# Altium PCB LampOne.PcbDoc
Units mm, origin at the board's own origin, x right, y up, seen from the top; angles counter-clockwise.
Board outline 63 x 19 mm, 2 copper layers (Top Layer, Bottom Layer), stack 1.571 mm thick; 38 components, 25 nets, 132 pads, 82 vias.
Unrouted connection lines stored in the file: 12.
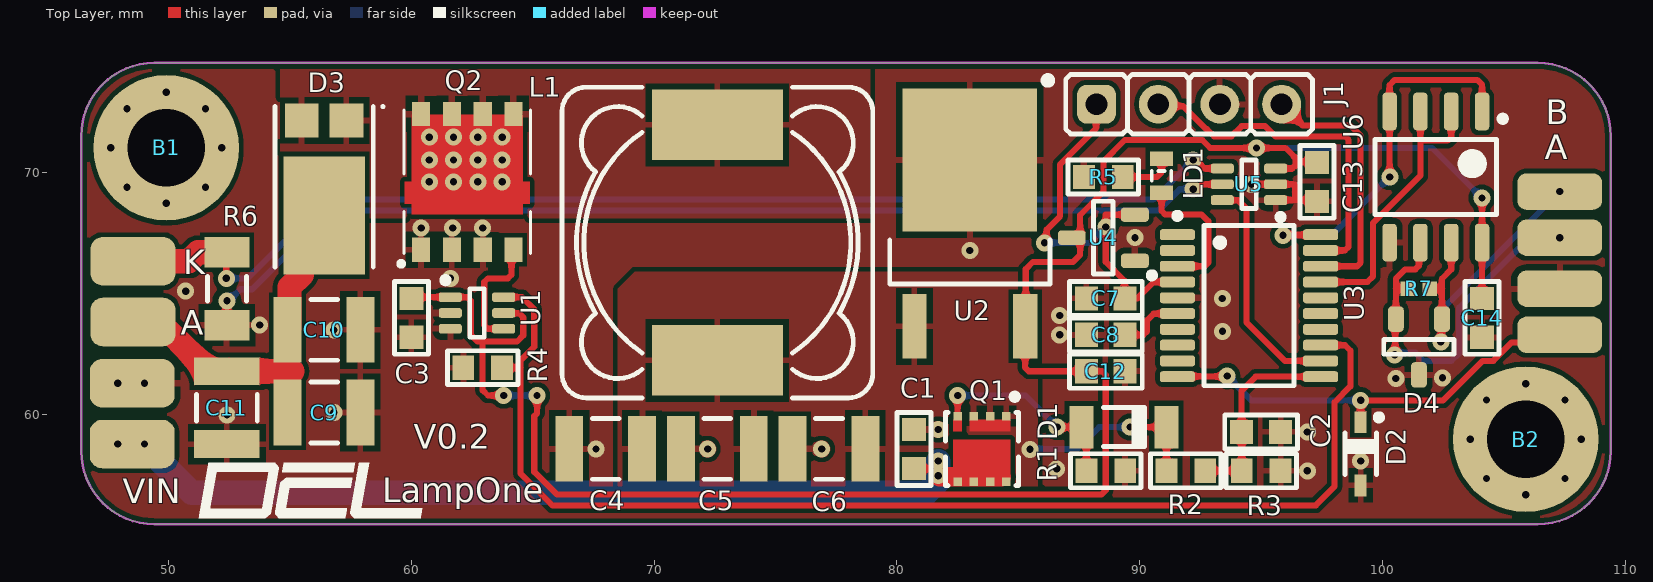
[diagram p0: Top Layer view]
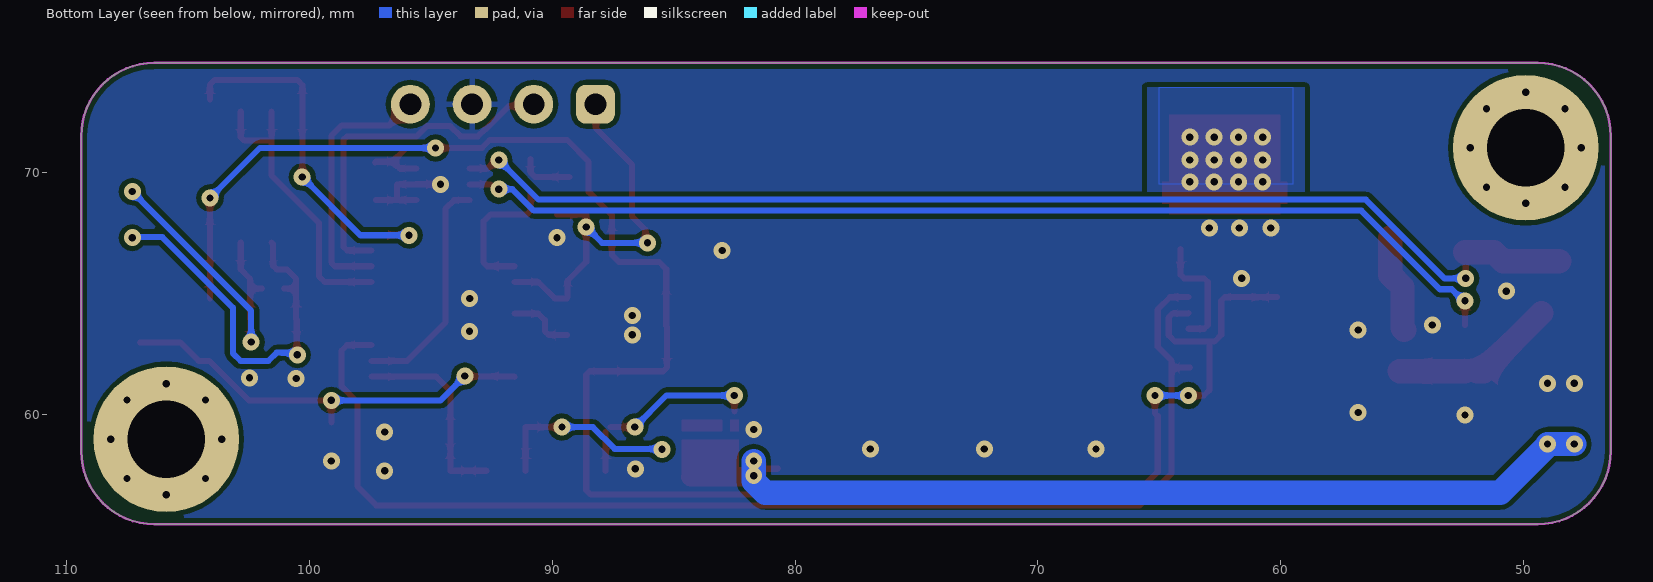
[diagram p1: Bottom Layer view, seen from below]
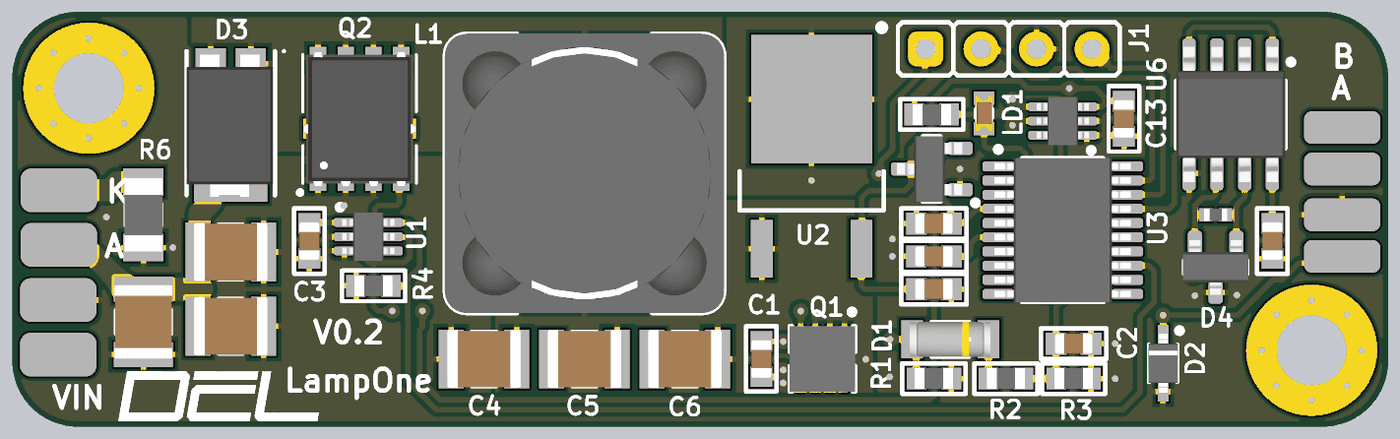
[diagram p2: 3D render of the assembled board from above, using the file's embedded part models]

## Layer stack, top to bottom
Top Solder: solder mask 0.0102, Solder Resist, Dk 3.5
Top Layer: signal copper 0.0356
Dielectric 1: dielectric 1.5, FR-4, Dk 4.8
Bottom Layer: signal copper 0.0356
Bottom Solder: solder mask 0.0102, Solder Resist, Dk 3.5

## Board outline
49.4,55.5 cw(c49.4,58.5) 46.4,58.5 46.4,71.5 cw(c49.4,71.5) 49.4,74.5 106.4,74.5 cw(c106.4,71.5) 109.4,71.5 109.4,58.5 cw(c106.4,58.5) 106.4,55.5

## Design rules (kind name [scope] priority, off if disabled: settings)
Clearance [All] p1: gap=0.2 ignorepadtopadclearanceinfootprint=FALSE
HoleSize [All] p1: absolutevalues=TRUE maxlimit=5 minlimit=0.2 maxpercent=80.000 minpercent=20.000
MinimumSolderMaskSliver [All] p1: minsoldermaskwidth=0
PolygonConnect [All] p1: thpad.connectstyle=Relief thpad.reliefconductorwidth=0.25 thpad.reliefentries=4 thpad.polygonreliefangle="90 Angle" thpad.airgapwidth=0.25 smdpad.connectstyle=Relief smdpad.reliefconductorwidth=0.25 smdpad.reliefentries=4 smdpad.polygonreliefangle="90 Angle" smdpad.airgapwidth=0.25 via.connectstyle=Direct via.reliefconductorwidth=0.254 via.reliefentries=4 via.polygonreliefangle="90 Angle" via.airgapwidth=0.254
RoutingVias [All] p1: holewidth=0.3 width=0.7 viastyle="Through Hole" minholewidth=0.3 minwidth=0.7 maxholewidth=1 maxwidth=1
SilkToSilkClearance [All] p1: silktosilkclearance=0.1
SilkToSolderMaskClearance [IsPad] p1: minsilkscreentomaskgap=0.1 clearancetoexposedcopper=TRUE
SolderMaskExpansion [All] p1: expansion=0.102 istentingtop=FALSE
Width [All] p1: maxlimit=2 minlimit=0.2 preferedwidth=0.25
26 further rules are at their usual default settings.

## Components (designator, comment, footprint, x,y, rotation, side; value= is the part's Value field where it differs from the comment)
B1 "Non Plated Hole" MTG600H320V8P#1 49.9,71 r0 top
B2 "Non Plated Hole" MTG600H320V8P#2 105.9,59 r0 top
C1 "100n" CAPC1608X87N 80.7,58.6 r270 top
C2 "100n" CAPC1608X87N 95,59.3 r180 top
C3 "100n" CAPC1608X87N 60,64 r270 top
C4 "10u" CAPC3225X270N 68,58.6 r0 top
C5 "10u" CAPC3225X270N 72.6,58.6 r0 top
C6 "10u" CAPC3225X270N 77.2,58.6 r0 top
C7 "4.7u" CAPC1608X87N 88.6,64.8 r0 top
C8 "100n" CAPC1608X87N 88.6,63.3 r0 top
C9 "10u" CAPC3225X270N 56.4,60.1 r180 top
C10 "10u" CAPC3225X270N 56.4,63.5 r180 top
C11 "10u" CAPC3225X270N 52.4,60.3 r90 top
C12 "4.7u" CAPC1608X87N 88.6,61.8 r180 top
C13 "100n" CAPC1608X87N 97.3,69.6 r270 top
C14 "100n" CAPC1608X87N 104.1,64 r270 top
D1 "BZV55-B10" DIOMELF3515N 89.35,59.5 r180 top
D2 "CDSOD323-T03C" SOD2512X110N 99.1,58.4 r270 top
D3 "SBRT15U100SP5" SBRT15U100SP5 56.4,69.4 r270 top
D4 "CDSOT23-SM712" SOT95P240X130-3N 101.5,62.8 r270 top
J1 "Header 4" 3M_2304-6111-TG 88.22,72.8 r0 top
L1 "10uH" IND_BOURNS_PM127SH 72.6,67.1 r90 top
LD1 "Red" LEDC1608X80N_RED 90.9,69.847 r270 top
Q1 "IRFHM9331" PQFN50P300X300X100_HS-9N 83.5,58.6 r270 top
Q2 "AON6294" DFN-5X6-8L 62.3,69.6 r90 top
R1 "5k1" RESC1608X55N 88.6,57.7 r180 top
R2 "100k" RESC1608X55N 91.9,57.7 r180 top
R3 "2k" RESC1608X55N 95,57.7 r180 top
R4 "100k" RESC1608X55N 62.935,61.946 r0 top
R5 "2k" RESC1608X55N 88.5,69.8 r0 top
R6 "0R033" RESC3216X80N 52.4,65.2 r90 top
R7 "120" RESC1005X40N 101.5,65.2 r180 top
U1 "TS5A3159" SOT65P210X110-6N 62.7,64.2 r0 top
U2 "L78M05CDT" TO228P1010X239-3N-R521X544 83,67.9 r90 top
U3 "STM32G030F6P6" SOP65P640X110-20N 94.5,64.5 r0 top
U4 "XC6206P332MR" SOT95P280X115-3N 88.5,67.3 r180 top
U5 "INA213" SOT65P210X110-6N 94.5,69.5 r180 top
U6 "MAX485ESA" SOIC127P600X175-8N 102.195,69.8 r270 top

## Footprints (in the part's own frame and the unit in brackets; to place one, negate y for a bottom-side part, rotate by r counter-clockwise, add the part's x,y. Pads: shape width x height; smd on the part's side, far side on the other; paste and mask are expansions set on the pad)
3M_2304-6111-TG [mm] "4 Contacts Straight Strip Header Pitch 2.54mm L=5.8mm ''Mini-Wire-Wrap''"
  rrect50% 1.6x1.6 hole 0.9: 1(0,0)
  round 1.6 hole 0.9: 2(2.54,0) 3(5.08,0) 4(7.62,0)
  silkscreen extent -2.16,-1.23 8.89,1.23
CAPC1608X87N [mm] "Chip Capacitor, Body 1.6x0.8mm IPC Medium Density"
  rect 0.95x1 smd: 1(-0.8,0) 2(0.8,0)
  silkscreen extent -1.5,-0.7 1.5,0.7, body extent -0.87,-0.47 0.88,0.48, height 0.87
CAPC3225X270N [mm] "Chip Capacitor, Body 3.2x2.5mm, IPC Medium Density"
  rect 1.15x2.7 smd: 1(-1.5,0) 2(1.5,0)
  silkscreen extent -0.55,-1.25 0.55,1.25, body extent -1.7,-1.35 1.7,1.35, height 2.7
DFN-5X6-8L [mm] "DFN 5x6"
  rect 1x0.75 smd: 1(-2.795,1.905) 2(-2.795,0.635) 3(-2.795,-0.635) 4(-2.795,-1.905) 5(2.795,-1.905) 6(2.795,-0.635) 7(2.795,0.635) 8(2.795,1.905)
  Top Layer region: 0,2.28 2.775,2.28 2.775,-2.28 0,-2.28 0,-2.575 -0.905,-2.575 -0.905,-2.28 -1.33,-2.28 -1.33,2.28 -0.905,2.28 -0.905,2.575 0,2.575
  silkscreen extent -3.47,-2.6 2.95,2.82, body extent -3.09,-2.58 3.06,2.57, height 1.1
DIOMELF3515N [mm] "SOD80C, MELF Diode, 2-Leads, Body 3.5x1.5mm, IPC Medium Density"
  rect 1x1.75 smd: 1(-1.75,0) 2(1.75,0)
  silkscreen extent -0.85,-0.8 0.85,0.8, body extent -1.85,-0.8 1.85,0.8, height 1.6
IND_BOURNS_PM127SH [mm] "SMD Inductor  Body Width 12.5mm Body Lenght 12.5mm Height 8mm"
  rect 2.9x5.4 smd: 1(-4.85,0) 2(4.85,0)
  silkscreen extent -6.4,-6.4 6.4,6.4, body extent -6.4,-6.4 6.4,6.4, height 8
LEDC1608X80N_RED [mm] "Chip RED LED, 2-Leads, Body 1.6x0.8mm, IPC Medium Density"
  rect 0.6x0.95 smd: 1(-0.7,0) 2(0.7,0)
  silkscreen extent -0.2,-0.4 0.2,0.4, body extent -0.8,-0.4 0.8,0.4, height 0.6
MTG600H320V8P#1 [mm] "Through Hole: Hole Dia.=3.2mm Pad Dia.=6mm + 8 Via Dia.=0.3mm"
  round 6 hole 3.2 unplated: MH1(0,0)
MTG600H320V8P#2 [mm] "Through Hole: Hole Dia.=3.2mm Pad Dia.=6mm + 8 Via Dia.=0.3mm"
  round 6 hole 3.2 unplated: MH2(0,0)
PQFN50P300X300X100_HS-9N [mm] "PQFN, 8-Leads, Body 3,00x3,00mm, Pitch 0,50mm, Thermal Pad 4,00x2,20mm, IPC Medium Density"
  rect 0.35x0.35 smd: 1(-1.35,0.998) 2(-1.35,0.332) 3(-1.35,-0.334) 4(-1.35,-1) 5(1.35,-1) 6(1.35,-0.334) 7(1.35,0.332) 8(1.35,0.998)
  Top Layer region: -0.375,1.173 1.2,1.173 1.2,-1.175 -0.375,-1.175
  Top Layer region: -1.2,1.173 -0.725,1.173 -0.725,-0.509 -1.2,-0.509
  Top Layer region: -1.2,-0.825 -0.725,-0.825 -0.725,-1.175 -1.2,-1.175
  silkscreen extent -2.27,-1.5 1.5,1.5, body extent -1.51,-1.5 1.52,1.5, height 1
RESC1005X40N [mm] "Chip Resistor, EIA 0402, Metric 1005, Body 1.0x0.5mm, IPC Medium Density"
  rect 0.6x0.6 smd: 1(-0.45,0) 2(0.45,0)
  body extent -0.52,-0.27 0.53,0.28, height 0.4
RESC1608X55N [mm] "Chip Resistor, EIA 0603, Metric 1608, Body 1.6x0.8mm, IPC Medium Density"
  rect 0.9x1 smd: 1(-0.8,0) 2(0.8,0)
  silkscreen extent -1.45,-0.7 1.45,0.7, body extent -0.87,-0.47 0.88,0.48, height 0.55
RESC3216X80N [mm] "Chip Resistor, EIA 1206, Metric 3216, Body 3.2x1.6mm, IPC Medium Density"
  rect 1.25x1.85 smd: 1(-1.5,0) 2(1.5,0)
  silkscreen extent -0.5,-0.8 0.5,0.8, body extent -1.67,-0.87 1.68,0.88, height 0.8
SBRT15U100SP5 [mm] "DFN, 3-Leads, Body 4.05x6.6mm"
  rect 1.4x1.39 smd: 1(-2.727,0.92) 2(-2.727,-0.92)
  rect 4.86x3.36 smd: 3(1.177,0)
  silkscreen extent -3.35,-2.02 3.3,2.48, body extent -3.14,-2.03 3.37,1.94, height 1.15
SOD2512X110N [mm] "Small Outline Diode Flat Lead (SOD-323), 1.70mm W X 1.25mm L X 1.10mm H body,  IPC Medium Density"
  rect 0.9x0.5 smd: 1(-1.3,0) 2(1.3,0)
  silkscreen extent -1.62,-0.65 0.85,0.88, body extent -1.35,-0.67 1.35,0.68, height 1.1
SOIC127P600X175-8N [mm] "SOIC 8, Pitch 1.27mm - Body 4x5mm, IPC Medium Density"
  rrect50% 1.55x0.6 smd: 1(-2.7,1.905) 2(-2.7,0.635) 3(-2.7,-0.635) 4(-2.7,-1.905) 5(2.7,-1.905) 6(2.7,-0.635) 7(2.7,0.635) 8(2.7,1.905)
  silkscreen extent -2.52,-2.5 1.55,2.88, body extent -3.1,-2.5 3.1,2.5, height 1.75
SOP65P640X110-20N [mm] "SOP, 20-Leads, Body 6.6x4.5mm (max), Pitch 0.65mm, IPC Medium Density"
  rrect50% 1.45x0.45 smd: 1(-2.95,2.925) 2(-2.95,2.275) 3(-2.95,1.625) 4(-2.95,0.975) 5(-2.95,0.325) 6(-2.95,-0.325) 7(-2.95,-0.975) 8(-2.95,-1.625) 9(-2.95,-2.275) 10(-2.95,-2.925) 11(2.95,-2.925) 12(2.95,-2.275) 13(2.95,-1.625) 14(2.95,-0.975) 15(2.95,-0.325) 16(2.95,0.325) 17(2.95,0.975) 18(2.95,1.625) 19(2.95,2.275) 20(2.95,2.925)
  silkscreen extent -3.07,-3.3 1.85,3.82, body extent -3.12,-3.3 3.12,3.3, height 1.19
SOT65P210X110-6N [mm] "SOT363, SC70-6, SOT, 0.65mm Pitch, 6 pin, 1.25mm W X 2.00mm L X 1.10mm H, IPC Medium Density"
  rrect50% 0.95x0.4 smd: 1(-1.1,0.65) 2(-1.1,0) 3(-1.1,-0.65) 4(1.1,-0.65) 5(1.1,0) 6(1.1,0.65)
  silkscreen extent -1.42,-1 0.3,1.47, body extent -1.2,-1.1 1.2,1.1, height 1.1
SOT95P240X130-3N [mm] "SOT23 3-Leads, Pitch 0.95mm - Body 1.3x2.9mm, IPC Medium Density"
  rrect50% 1.05x0.65 smd: 1(-1.15,0.95) 2(-1.15,-0.95) 3(1.15,0)
  silkscreen extent -0.3,-1.45 0.3,1.45, body extent -1.25,-1.5 1.25,1.5, height 1.3
SOT95P280X115-3N [mm] "SOT23SOT, 0.95mm, pitch;3 pin,1.55mm W X 2.95mm L X 1.15mm H body, IPC Medium Density"
  rrect50% 1.15x0.6 smd: 1(-1.3,0.95) 2(-1.3,-0.95) 3(1.3,0)
  silkscreen extent -2.12,-1.5 0.4,1.67, body extent -1.4,-1.5 1.6,1.5, height 1.15
TO228P1010X239-3N-R521X544 [mm] "TO-252AA DPAK TO, 2.28mm pitch; 2 pin, 10.105mm L X 6.095mm W X 2.39mm H body, IPC Medium Density"
  rect 2.65x1 smd: 1(-4.25,2.28) 2(-4.25,-2.28)
  rect 5.9x5.55 smd: 3(2.6,0)
  silkscreen extent -2.5,-3.3 -0.7,3.3, body extent -5,-3.38 5.27,3.37, height 2.38

## Part data
B1 B2: library part NON-PLATED_HOLE3.2_PAD6.0_8p, "Single Terminal Socket", Author=DEL, Component Type="Standard (No BOM)", ComponentHeight=0mm, CreateDate=11/21/2022, Family="Non Plated Hole", LatestRevisionDate=11/21/2022, Mounted=No, PackageDescription="Non Plated Through Hole: Hole Dia.=3.2mm", Part Description="Through Hole: Hole Dia.=3.2mm Pad Dia.=6mm + 6 Via Dia.=0.3mm", Part Number=NON-PLATED_HOLE3.2_PAD6.0_8p, Pin Count=1, SMD=No, Socket=No, Status=None
C1 C2 C3 C8 C13 C14: library part CC0603_100NF_50V_10%_X7R, "Non-polarised capacitor", Case=0603, Manufacturer=GENERIC, Manufacturer1 ComponentHeight=0.87mm, Tolerance=±10%, Voltage=50V, Author=Elman, Component Type=Standard, CreateDate=7/14/2014, LatestRevisionDate=7/14/2014, Manufacturer Part Number=CC0603_100NF_50V_10%_X7R, Mounted=Yes, Part Description="SMD Multilayer Chip Ceramic Capacitor", Part Number=CC0603_100NF_50V_10%_X7R, Pin Count=2, SMD=Yes, Socket=No, Status=Preferred, TC=X7R
C4 C5 C6 C9 C10 C11: library part CC1210_10UF_25V_10%_X7R, "Non-polarised capacitor", Case=1210, Manufacturer=GENERIC, Manufacturer1 ComponentHeight=2.7mm, Manufacturer1 Example=KEMET, Manufacturer1 Part Number=C1210C106K3RAC, Manufacturer Part Number=CC1210_10UF_50V_10%_X7R, Tolerance=±10%, Voltage=50V, Author="CERN DEM JLC", Component Type=Standard, CreateDate=5/5/2009, HelpURL=\\cern.ch\dfs\Applications\Altium\Datasheets\CC1210_X7R_KEMET.pdf, LatestRevisionDate=4/1/2010, Mounted=Yes, Part Description="SMD Multilayer Chip Ceramic Capacitor", Part Number=CC1210_10UF_50V_10%_X7R, Pin Count=2, SMD=Yes, Socket=No, Status=None, TC=X7R
C7 C12: library part CC0603_4.7UF_10V_10%_X5R, "Non-polarised capacitor", Case=0603, Manufacturer=GENERIC, Manufacturer1 ComponentHeight=0.95mm, Manufacturer1 Example=TDK, Manufacturer1 Part Number=C1608X5R1A475K080AC, Manufacturer Part Number=CC0603_4.7uF_10V_10%_X5R, Tolerance=±10%, Voltage=10V, Author=ELMAN, Component Type=Standard, CreateDate=11/13/2016, LatestRevisionDate=11/13/2016, Mounted=Yes, Part Description="SMD Multilayer Chip Ceramic Capacitor", Part Number=CC0603_4.7UF_10V_10%_X5R, Pin Count=2, SMD=Yes, Socket=No, Status=Preferred, TC=X5R
D1: "Zener Diode", Case=SOD-80C, Manufacturer="PHILIPS NXP", Power=500mW, Voltage=10V, Author="CERN DEM JLC", Component Type=Standard, ComponentHeight=1.6mm, CreateDate=5/6/2008, Device=BZV55-B10, HelpURL=\\cern.ch\dfs\Applications\Altium\Datasheets\BZV55.pdf, LatestRevisionDate=5/6/2008, Manufacturer Part Number=BZV55-B10, Mounted=Yes, PackageDescription="SOD80C, MELF Diode, 2-Leads, Body 3.5x1.5mm, IPC Medium Density", Part Description="Voltage Regulator Diode", Part Number=BZV55-B10, Pin Count=2, SMD=Yes, Socket=No
D2: "Transient Voltage Suppressor Diode (Bi-Directional)", Case=SOD323, Manufacturer=BOURNS, Power=20A, Voltage=4V, Author=DEL, Component Type=Standard, ComponentHeight=1.1mm, CreateDate=11/21/2022, Device=CDSOD323-T03C, LatestRevisionDate=11/21/2022, Manufacturer Part Number=CDSOD323-T03C, Mounted=Yes, PackageDescription="SOD-323, 1.70mm W X 1.25mm L X 1.10mm H", Part Description="TVS Diode", Part Number=CDSOD323-T03C, Pin Count=3, SMD=Yes, Socket=No
D3: "Diode  Schottky Anode pin 1 and 2 cathode pin 3", Case=DFN, Manufacturer=DIODES, Power=15A, Voltage=100V, Author=DEL, Component Type=Standard, ComponentHeight=1.15mm, CreateDate=6/24/2022, Device=SBRT15U100SP5, LatestRevisionDate=6/24/2022, Manufacturer Part Number=SBRT15U100SP5, Mounted=Yes, PackageDescription="DFN, 3-Leads, Body 4.05x6.6mm", Part Description="Schottky Rectifier", Part Number=SBRT15U100SP5, Pin Count=3, SMD=Yes, Socket=No
D4: "Transient Voltage Suppressor Diode (Bi-Directional)", Case=SOT23-3, Manufacturer=BOURNS, Power=17A, Voltage=7.5V, Author=DEL, Component Type=Standard, ComponentHeight=1.3mm, CreateDate=1/27/2022, Device=CDSOT23-SM712, LatestRevisionDate=1/27/2022, Manufacturer Part Number=CDSOT23-SM712, Mounted=Yes, PackageDescription="SOT23 3-Leads, Pitch 0.95mm - Body 1.3x2.9mm, IPC Medium Density", Part Description="TVS Diode", Part Number=CDSOT23-SM712, Pin Count=3, SMD=Yes, Socket=No
J1: library part 3M_2304-6111-TG, "Connector 4 Male", Manufacturer=3M, Author=DEL, Component Type=Standard, ComponentHeight=8.4mm, CreateDate=2018-09-13, Family="Header 4", LatestRevisionDate=2018-09-13, Manufacturer Part Number=3M_2304-6111-TG, Mounted=Yes, Part Description="4 Contacts - Vertival Contacts Straight Strip Header Pitch 2.54", Part Number=3M_2304-6111-TG, Pin Count=4, SMD=No, Socket=No, Status=None
L1: library part IND_4.7UH_20%_SUMIDA_CDRH124, "Inductor", Manufacturer=SUMIDA, Manufacturer Part Number=CDRH125NP-10R, Part Number=IND_10UH_20%_SUMIDA_CDRH125, Power=4A, Resistance=0.018R, Tolerance=±20%, Author="CERN DEM JLC", Component Type=Standard, ComponentHeight=4.5mm, CreateDate=11/18/2009, HelpURL=\\cern.ch\dfs\Applications\Altium\Datasheets\IND_BOURNS_PM127SH.pdf, LatestRevisionDate=11/18/2009, Mounted=Yes, Part Description="Shielded SMD Power Inductors CDRH125 Series", Pin Count=2, SMD=Yes, Socket=No, Status=None
LD1: library part LED_ROHM_SML-311UTT86K, "LED 1C 2A", Manufacturer=ROHM, Manufacturer Part Number=SML-311UTT86K, Author="CERN DEM JLC", Color=Red, Component Type=Standard, ComponentHeight=0.8mm, CreateDate=3/16/2010, HelpURL=\\cern.ch\dfs\Applications\Altium\Datasheets\LED_ROHM_SML-311UTT86K.pdf, LatestRevisionDate=3/17/2010, Mounted=Yes, PackageDescription="Chip Red LED, 2-Leads, Body 1.6x0.8mm, IPC Medium Density", Part Description="Low current chip LED SML-311 Serie", Part Number=LED_ROHM_SML-311UTT86K, Pin Count=2, SMD=Yes, Socket=No
Q1: library part IRFHM9331TRPbF, "P-CHANNEL MOSFET WITH DIODE", Case=PQFN, Manufacturer=INFINEON, Author=DEL, Component Type=Standard, ComponentHeight=1mm, CreateDate=29.01.2018, Device=IRFHM9331, LatestRevisionDate=29.01.2018, Manufacturer Part Number=IRFHM9331TRPbF, Mounted=Yes, PackageDescription="PQFN, 8-Leads, Body 3,00x3,00mm, Pitch 0,50mm, Thermal Pad 4,00x2,20mm, IPC Medium Density", Part Description="-30V 11A 0.014 Ohm P-Channel  MOSFET", Part Number=IRFHM9331TRPbF, Pin Count=8, SMD=Yes, Socket=No
Q2: Case=DFN-5X6, Manufacturer="LPHA & OMEGA SEMICONDUCTOR", Author=DEL, Component Type=Standard, ComponentHeight=1mm, CreateDate=6/24/2022, Device=AON6294, LatestRevisionDate=6/24/2022, Manufacturer Part Number=AON6294, Mounted=Yes, PackageDescription="DFN 5x6", Part Description="100V N-Channel AlphaMOS", Part Number=AON6294, Pin Count=8, SMD=Yes, Socket=No
R1: library part R0603_5K1_1%_0.1W_100PPM, "Resistor - 1%", Case=0603, Manufacturer=GENERIC, Manufacturer1 ComponentHeight=0.55mm, Manufacturer1 Example="NIC COMPONENT", Manufacturer1 Part Number=NRC06F5101TRF, Power=0.1W, Tolerance=±1%, Author="CERN DEM JLC", Component Type=Standard, CreateDate=12/3/2007, HelpURL=\\cern.ch\dfs\Applications\Altium\Datasheets\R0603_NIC_NRC.pdf, LatestRevisionDate=3/13/2008, Manufacturer Part Number=R0603_5K1_1%_0.1W_100PPM, Mounted=Yes, Part Description="General Purpose Thick Film Chip Resistor", Part Number=R0603_5K1_1%_0.1W_100PPM, Pin Count=2, SMD=Yes, Socket=No, Status=Preferred, TC=±100ppm/°C
R2 R4: library part R0603_100K_1%_0.1W_100PPM, "Resistor - 1%", Case=0603, Manufacturer=GENERIC, Manufacturer1 ComponentHeight=0.55mm, Manufacturer1 Example="NIC COMPONENT", Manufacturer1 Part Number=NRC06F1003TRF, Power=0.1W, Tolerance=±1%, Author="CERN DEM JLC", Component Type=Standard, CreateDate=12/3/2007, HelpURL=\\cern.ch\dfs\Applications\Altium\Datasheets\R0603_NIC_NRC.pdf, LatestRevisionDate=3/13/2008, Manufacturer Part Number=R0603_100K_1%_0.1W_100PPM, Mounted=Yes, Part Description="General Purpose Thick Film Chip Resistor", Part Number=R0603_100K_1%_0.1W_100PPM, Pin Count=2, SMD=Yes, Socket=No, Status=Preferred, TC=±100ppm/°C
R3 R5: library part R0603_2K_1%_0.1W_100PPM, "Resistor - 1%", Case=0603, Manufacturer=GENERIC, Manufacturer1 ComponentHeight=0.55mm, Manufacturer1 Example="NIC COMPONENT", Manufacturer1 Part Number=NRC06F2001TRF, Power=0.1W, Tolerance=±1%, Author="CERN DEM JLC", Component Type=Standard, CreateDate=12/3/2007, HelpURL=\\cern.ch\dfs\Applications\Altium\Datasheets\R0603_NIC_NRC.pdf, LatestRevisionDate=3/13/2008, Manufacturer Part Number=R0603_2K_1%_0.1W_100PPM, Mounted=Yes, Part Description="General Purpose Thick Film Chip Resistor", Part Number=R0603_2K_1%_0.1W_100PPM, Pin Count=2, SMD=Yes, Socket=No, Status=Preferred, TC=±100ppm/°C
R6: library part R1206_0R033_1%_0.25W_100PPM, "Resistor - 1%", Case=1206, Manufacturer=YAGEO, Manufacturer Part Number=RC1206FR-0733RL, Power=0.25W, Tolerance=±1%, Author=DEL, Component Type=Standard, ComponentHeight=0.65mm, CreateDate=10/28/2023, LatestRevisionDate=10/28/2023, Mounted=Yes, Part Description="Low Value Flat Chip Resistor", Part Number=R1206_0R033_1%_0.25W_100PPM, Pin Count=2, SMD=Yes, Socket=No, TC=±100ppm/°C
R7: library part R0402_120R_1%_0.0625W_100PPM, "Resistor - 1%", Case=0402, Manufacturer=GENERIC, Manufacturer1 ComponentHeight=0.4mm, Manufacturer1 Example=PHYCOMP, Manufacturer1 Part Number=232270671201, Power=0.0625W, Tolerance=±1%, Author="CERN DEM JLC", Component Type=Standard, CreateDate=12/3/2007, HelpURL=\\cern.ch\dfs\Applications\Altium\Datasheets\R0402_Phycomp_RC0402.pdf, LatestRevisionDate=3/13/2008, Manufacturer Part Number=R0402_120R_1%_0.0625W_100PPM, Mounted=DNP, Part Description="General Purpose Thick Film Chip Resistor", Part Number=R0402_120R_1%_0.0625W_100PPM, Pin Count=2, SMD=Yes, Socket=No, Status="Not recommended", TC=±100ppm/°C
U1: library part TS5A3159DCKR, "1-Ω SPDT Analog Switch", Case=SC70-6, Manufacturer="TEXAS INSTRUMENTS", Manufacturer Part Number=ADS1271IBPW, Author=DEL, Component Type=Standard, ComponentHeight=1.1mm, CreateDate=6/20/2022, Device=TS5A3159, LatestRevisionDate=6/20/2022, Mounted=Yes, PackageDescription="SC70-6, SOT, 0.65mm Pitch, 6 pin", Part Description="1-Ω SPDT Analog Switch", Part Number=TS5A3159DCKR, Pin Count=6, SMD=Yes, Socket=No
U2: library part L78M05CDT-TR, "3-Terminal Regulator 1=IN 2=OUT 3=GND", Case=DPAK, Manufacturer="ST MICROELECTRONICS", Manufacturer Part Number=LM7805CT, Author=DEL, Component Type=Standard, ComponentHeight=2.39mm, CreateDate=12/13/2017, Device=L78M05CDT, LatestRevisionDate=12/13/2017, Mounted=Yes, PackageDescription="TO-252 DPAK TO, 2.28mm pitch; 2 pin, 10.105mm L X 6.095mm W X 2.39mm H body, IPC Medium Density", Part Description="3-Terminal 5V 0.5A Positive Voltage Regulator", Part Number=L78M05CDT-TR, Pin Count=3, SMD=No, Socket=No
U3: "Arm® Cortex®-M0+ 32-bit MCU", Case=TSSOP20, Manufacturer="ST Microelectronics", Manufacturer Part Number=STM32F030F4P6, Author=DEL, Component Type=Standard, ComponentHeight=1.2mm, CreateDate=1/26/2022, Device=STM32G030F6P6, LatestRevisionDate=7/21/2025, Mounted=Yes, PackageDescription="SOP, 20-Leads, Body 6.6x4.5mm (max), Pitch 0.65mm, IPC Medium Density", Part Description="Arm® Cortex®-M0+ 32-bit MCU", Part Number=STM32G030F6P6, Pin Count=20, SMD=Yes, Socket=No
U4: "3-Terminal Regulator 1=GND 2=OUT 3=IN", Case=SOT23, Manufacturer=TOREX, Manufacturer Part Number=SOT95P280X115-3N, Author=DEL, Component Type=Standard, ComponentHeight=1.1mm, CreateDate=1/27/2022, Device=XC6206P332MR, LatestRevisionDate=1/27/2022, Mounted=Yes, PackageDescription="SOT23 3-Leads, Pitch 0.95mm - Body 1.3x2.9mm, IPC Medium Density", Part Description="3-Terminal 3.3V 200mA Positive Voltage Regulator", Part Number=XC6206P332MR, Pin Count=3, SMD=Yes, Socket=No
U5: library part INA213xID, "INA21x Voltage Output, Low- or High-Side Measurement, Bidirectional, Zero-Drift Series, Current-Shunt Monitors. Wide Common-Mode Range: –0.3 V to 26 V.", Case=SC70-6, Manufacturer="TEXAS INSTRUMENTS", Manufacturer Part Number=INA213AIDCKT, Author=DEL, Component Type=Standard, ComponentHeight=1.1mm, CreateDate=10/9/2017, Device=INA213, LatestRevisionDate=10/9/2017, Mounted=Yes, PackageDescription="SOT363, SC70-6, SOT, 0.65mm Pitch, 6 pin, 1.25mm W X 2.00mm L X 1.10mm H, IPC Medium Density", Part Description="Current-Shunt Monitors,  –0.3 V to 26 V", Part Number=INA213xID, Pin Count=6, SMD=Yes, Socket=No
U6: "Low-Power, Slew-Rate-Limited / RS-485/RS-422 Transceivers", Case=SOIC8, Manufacturer=MAXIM, Author=DEL, Component Type=Standard, ComponentHeight=1.75mm, CreateDate=1/20/2020, Device=MAX485ESA, LatestRevisionDate=1/20/2020, Manufacturer Part Number=MAX485ESA, Mounted=Yes, PackageDescription="SOIC 8, Pitch 1.27mm - Body 4x5mm, IPC Medium Density", Part Description="Low-Power, Slew-Rate-Limited RS-485/RS-422 Transceivers", Part Number=MAX485ESA, Pin Count=8, SMD=Yes, Socket=No

## Free pads (board coordinates)
  rrect50% 3.5x2 smd: ""(48.5,58.8) ""(48.5,61.3) ""(48.526,63.827) ""(48.526,66.327)
  rrect50% 3.5x1.5 smd: ""(107.3,63.3) ""(107.3,65.2) ""(107.3,67.3) ""(107.3,69.2)

## Via types
v1: diameter 0.7, hole 0.3, Top Layer to Bottom Layer, tented both sides, 66 vias
v2: diameter 1, hole 0.3, Top Layer to Bottom Layer, 16 vias

## Nets (pads, with @x,y where several pads share a name; then routed paths per layer and width w, separated by ;. In a path a pad name is that pad's centre, name@x,y a point inside that pad or via, vN(x,y) a via of type N, cw(c..) or ccw(c..) an arc to the next point about the centre after c; other vN are vias at no path point)
0V: C1.1 C2.1 C3.2 C4.1 C5.1 C6.1 C7.1 C8.1 C9.1 C10.1 C11.1 C12.1 C13.2 C14.2 D2.2 D4.3 J1.3 pad.@48.5,61.3 pad.@107.3,65.2 Q2.1 Q2.2 Q2.3 R1.1 R3.1 R4.1 R5.1 R6.1 U1.2 U1.3 U2.3 U3.5 U4.1 U5.1 U5.2 U5.5 U6.5 | length 47.9
  Top Layer w0.25: R6.1 v1(52.4,64.7) ; v1@92.379,69.336 92.543,69.5 U5.5 ; U5.1 C13.2@97.25,68.85 ; U5.2 96.4,69.5 96.4,68.875
  Top Layer w0.254: v1(94.6,69.5) U5.2
  Bottom Layer w0.25: v1(52.4,64.7) 52.471,64.7 52.948,65.177 53.438,65.177 56.677,68.416 90.76,68.416 91.644,69.3 v1(92.2,69.3)
  other v1: 96.9,57.7 86.579,57.783 99.1,58.1 67.6,58.6 72.2,58.6 76.9,58.6 96.9,59.3 81.7,59.4 52.4,60 56.8,60.1 47.9,61.3 49,61.3 100.55,61.5 102.473,61.527 86.7,63.3 93.405,63.446 56.8,63.5 53.746,63.703 86.7,64.1 93.4,64.8 50.7,65.1 61.6,65.628 83,66.775 89.8,67.3 60.4,67.7 61.7,67.7 62.935,67.7
5V: C3.1 C12.2 C13.1 C14.1 U1.1 U1.5 U2.2 U4.3 U5.3 U6.8 | length 83.3
  Top Layer w0.25: C3.1@60.15,64.85 U1.1 62.297,64.85 62.444,64.704 62.444,63.3 62.719,63.025 64.351,63.025 64.605,63.279 64.605,64.017 64.44,64.182 63.818,64.182 U1.5 ; 62.935,62.96 62.935,61.018 63.153,60.8 v1(63.8,60.8) ; v1(65.175,60.8) 65.175,60.066 65.059,59.95 65.059,57.656 65.99,56.725 88.429,56.725 88.6,56.896 88.6,61.654 88.454,61.8 C12.2 85.426,61.8 85.28,61.946 U2.2 85.304,63.674 85.304,66.004 85.604,66.304 87.254,66.304 87.545,66.595 87.545,68.236 88.5,69.19 88.5,70.436 89.389,71.325 92.575,71.325 92.905,70.995 v1(94.805,70.995) 96.005,70.995 96.571,70.429 ; U5.3 96.293,70.15 96.571,70.429 ; C13.1 97.271,70.429 96.571,70.429 ; C14.1 U6.8 104.1,68.854 v1@104.246,69
  Bottom Layer w0.25: v1(63.8,60.8) v1(65.175,60.8) ; v1(94.805,70.995) 102.042,70.995 v1(104.098,68.938)
+3.3V: C7.2 J1.1 U3.4 U4.2 | length 16.8
  Top Layer w0.25: v1(86.078,67.091) 86.164,67.177 86.164,67.631 86.723,68.191 86.723,68.307 86.723,70.323 88.2,71.8 88.2,72.78 J1.1 ; C7.2 89.371,64.829 89.371,65.532 88.6,66.303 88.6,68.25 U4.2 ; C7.2@89.425,64.8 89.9,64.8 90.575,65.475 U3.4
  Bottom Layer w0.25: v1(86.078,67.091) 87.949,67.091 v1(88.6,67.741)
ADC_IN4: C2.2 R2.1 R3.2 U3.11 | length 8.3
  Top Layer w0.25: R2.1 R3.2 C2.2 94.2,61 94.775,61.575 U3.11
ADC_IN5: U3.12 U5.6 | length 9.5
  Top Layer w0.25: U5.6 93.405,68.845 94.042,68.845 94.4,68.487 94.4,63.8 95.975,62.225 U3.12
ADC_IN7: U3.14
BT1: D2.1 pad.@107.3,63.3 U3.10 | length 17.8
  Top Layer w0.25: D2.1 v1(99.1,60.6) 102.5,60.6 104.125,62.225 104.56,62.225 105.321,62.987 pad.@106.987,62.987
  Top Layer w0.254: U3.10 91.563,61.588 93.588,61.588 v1(93.6,61.6)
  Bottom Layer w0.25: v1(93.6,61.6) 94.6,60.6 v1(99.1,60.6)
DE: U3.17 U6.2 U6.3 | length 12.1
  Top Layer w0.25: U3.17 99.375,65.475 99.6,65.7 99.6,67.9 101.56,69.86 U6.3 ; 101.69,71.3 102.684,71.3 102.83,71.446 U6.2
LED+: C9.2 C10.2 C11.2 D3.3 pad.@48.526,63.827 | length 10.4
  Top Layer w1: pad.@49.25,64.2 51.55,61.9 51.55,61.875 51.625,61.8 C11.2@51.9,61.8 ; C11.2 55.1,61.8 ; C10.2 54.975,63.575 54.975,65.269 55.479,65.773 D3.3@55.479,67.302
LED-: pad.@48.526,66.327 R6.2 U5.4 | length 48.3
  Top Layer w0.25: v1(52.373,65.627) 52.373,66.673 R6.2 ; v1(92.2,70.5) 92.303,70.5 92.653,70.15 U5.4
  Top Layer w1: pad.@48.526,66.327 50.832,66.327 51.205,66.7 R6.2
  Bottom Layer w0.25: v1(52.373,65.627) 53.252,65.627 56.491,68.866 90.566,68.866 v1(92.2,70.5)
NetD1_2: D1.2 Q1.4 R1.2 | length 7.9
  Top Layer w0.25: 82.5,60.15 v1(82.5,60.8) ; v1(86.6,59.5) D1.2 ; R1.2 D1.2@87.8,59.3
  Bottom Layer w0.25: v1(82.5,60.8) 85.3,60.8 v1(86.6,59.5)
NetD3_1: D3.1 D3.2 L1.2 Q2.5 Q2.6 Q2.7 Q2.8
  other v1: 60.735,69.6 61.735,69.6 62.735,69.6 63.735,69.6 60.735,70.5 61.735,70.5 62.735,70.5 63.735,70.5 60.735,71.44 61.735,71.44 62.735,71.44 63.735,71.44
NetLD1_1: LD1.1 R5.2 | length 2.2
  Top Layer w0.254: R5.2 90.7,69.8 90.9,70 LD1.1
NetLD1_2: LD1.2 U3.3 | length 5.8
  Top Layer w0.25: LD1.2@90.9,69.1 90.9,68.4 91.05,68.25 92.55,68.25 92.825,67.975
  Top Layer w0.254: U3.3 92.676,66.125 92.825,66.274 92.825,67.975
NetQ2_4: Q2.4 U1.4 | length 4.9
  Top Layer w0.25: U1.4 63.153,63.55 63,63.703 63,65.475 63.153,65.628 63.974,65.628 64.121,65.774 Q2.4@64.121,66.83
NRST: C8.2 U3.6 | length 2.8
  Top Layer w0.25: C8.2 90.154,63.3 90.3,63.446 90.3,63.9 90.575,64.175 U3.6
RS485A: D4.2 pad.@107.3,67.3 R7.2 U6.6 | length 16
  Top Layer w0.25: v1(100.5,62.476) 100.525,62.501 100.525,63.925 D4.2 100.55,65.2 ; R7.2 100.55,65.2 ; U6.6 101.501,67.041 101.501,66.141 101.355,65.995 100.93,65.995 100.55,65.615 100.55,65.2
  Bottom Layer w0.25: v1(100.5,62.476) 100.586,62.562 101.142,62.562 101.143,62.564 101.35,62.564 101.689,62.225 102.841,62.225 103.153,62.537 103.153,64.416 106.062,67.325 107.275,67.325 v1(107.3,67.3)
RS485B: D4.1 pad.@107.3,69.2 R7.1 U6.7 | length 13
  Top Layer w0.25: R7.1 102.45,65.2 ; v1(102.4,63) 102.425,63.025 102.425,63.925 D4.1 102.45,65.2 ; U6.7 102.83,65.995 102.45,65.615 102.45,65.2
  Bottom Layer w0.25: v1(102.4,63) 102.4,64.3 v1(107.3,69.2)
SWCLK: J1.2 U3.19 | length 14.4
  Top Layer w0.25: J1.2 90.84,72.72 91.789,72.72 92.734,71.775 92.761,71.775 93.061,71.475 93.775,71.475 94.2,71.9 95.165,71.9 95.59,71.475 98.454,71.475 98.6,71.329 98.6,66.921 98.454,66.775 U3.19
SWDIO: J1.4 U3.18 | length 10.7
  Top Layer w0.25: J1.4 96.715,71.925 98.675,71.925 99.1,71.5 99.1,66.271 98.954,66.125 U3.18
TIM3_CH1: R4.2 U1.6 U3.13 | length 50.8
  Top Layer w0.25: R4.2 64.5,61.946 ; U1.6 64.555,64.85 65.059,64.346 65.059,62.809 64.5,62.25 64.5,61.946 ; U3.13 98.454,62.875 98.675,62.654 98.675,61.175 98.029,60.529 98.029,57.054 97.25,56.275 65.804,56.275 64.5,57.579 64.5,61.946
TIM3_CH3: U3.15
TXRX: U3.20 U6.1 U6.4 | length 15.3
  Top Layer w0.25: v1(95.9,67.4) 95.913,67.412 U3.20@97.437,67.412 ; U6.4 100.29,73.59 100.5,73.8 103.9,73.8 104.1,73.6 U6.1@104.1,73 ; U6.4@100.295,72.495 100.295,69.805 v1(100.3,69.8)
  Bottom Layer w0.25: v1(95.9,67.4) 97.9,67.4 v1(100.3,69.8)
VIN+: C1.2 pad.@48.5,58.8 Q1.5 Q1.6 Q1.7 Q1.8 | length 39.2
  Top Layer w0.25: C1.2 80.717,57.783 v1@81.7,57.783
  Top Layer w0.8: v1@81.75,57.45 82.5,57.45 84.3,57.45
  Bottom Layer w1: v1(47.9,58.8) v1(49,58.8) 49,58.746 50.946,56.8 81.231,56.8 81.7,57.269 v1(81.7,57.5) v1(81.7,58.1)
VP: C4.2 C5.2 C6.2 D1.1 L1.1 Q1.1 Q1.2 Q1.3 R2.2 U2.1 | length 7.8
  Top Layer w0.25: v1(89.6,59.5) D1.1 R2.2
  Bottom Layer w0.25: v1@85.479,58.6 87.431,58.6 88.331,59.5 v1(89.6,59.5)
  other v1: 85.479,58.583
pads on no net: B1.MH1 B2.MH2 U3.1 U3.2 U3.7 U3.8 U3.9 U3.16
copper on no net:
  other v2: 105.9,56.714 104.284,57.384 107.516,57.384 103.614,59 108.186,59 104.284,60.616 107.516,60.616 105.9,61.286 49.9,68.714 48.284,69.384 51.516,69.384 47.614,71 52.186,71 48.284,72.616 51.516,72.616 49.9,73.286

## Polygon pours and split planes (outlines as drawn)
0V on Top Layer "0V_L01_P016" (solid, pour order 16): 49.4,55.5 cw(c49.4,58.5) 46.4,58.5 46.4,71.5 cw(c49.4,71.5) 49.4,74.5 106.4,74.5 cw(c106.4,71.5) 109.4,71.5 109.4,58.5 cw(c106.4,58.5) 106.4,55.5
VP on Top Layer "VP_L01_P012" (solid, pour order 12): 85.8,57 85.8,65.9 69.2,65.9 68.5,65.2 68.5,57
NetD3_1 on Top Layer "NETD3_1_L01_P014" (solid, remove dead copper, pour order 14): 78.9,74.3 54.6,74.3 54.6,70.6 58.165,70.6 58.165,68.1 78.9,68.1
0V on Bottom Layer "0V_L02_P015" (solid, pour order 15): 49.4,55.5 cw(c49.4,58.5) 46.4,58.5 46.4,71.5 cw(c49.4,71.5) 49.4,74.5 106.4,74.5 cw(c106.4,71.5) 109.4,71.5 109.4,58.5 cw(c106.4,58.5) 106.4,55.5
NetD3_1 on Bottom Layer "NETD3_1_L02_P013" (solid, pour order 13): 59,73.5 59,68.282 65.5,68.282 65.5,73.5
no net on Bottom Layer "NONET_L02_P017" (solid, pour order 17): 65,73.5 59.5,73.5 59.5,69.5 65,69.5

## Keep-outs
Keep-Out Layer:
  the board outline again, w0.1

## Other copper
Top Layer:
  pour cut-out: 93.8,69.8 93.8,69.2 94.1,69.2 94.1,69.8

## Silkscreen, mask and mechanical layers (free items; w line width, h text height)
Top Overlay:
  drawing of 4 lines, arcs and shapes, not listed
  text "B" at 106.731,71.975 h1
  text "A" at 106.689,70.523 h1
  text "K" at 50.6,65.8 h1
  text "A" at 50.5,63.3 h1
  text "V0.2" at 60.1,58.6 h1
  text "LampOne" at 58.8,56.4 h1
  text "VIN" at 48.1,56.358 h1

## Dimensions
49.9,71 to 105.9,59 on Mechanical 1
49.4,74.5 to 49.4,55.5 on Mechanical 1
46.4,71.5 to 109.4,71.5 on Mechanical 1